# EAGLE board rele V2 (EAGLE 4.16)

Size 160 x 100 mm. Coordinates in mm from the lower left corner, seen from the top.
Outline: 0,0 160,0 160,100 0,100 0,0
Copper layers (1*16): Top 0.035mm / dielectric 1.5mm / Bottom 0.035mm
Design rules "default": minimum track width 10mil, minimum drill 24mil, track to track 8mil, track to pad 8mil, pad to pad 8mil, via to via 8mil, smd to smd 8mil, copper to edge 40mil, drill to drill 8mil, minimum pad ring 10mil, minimum via ring 8mil, stop-mask expansion 4mil, vias tented up to drill 0mil, thermal gap 10mil

## Footprints (pad centres in the part's own frame; a part is rotated, then mirrored left to right if it is on the bottom)
C025-040X050 = drill 0.813 octagon: 1 -1.27,0; 2 1.27,0
E2,5-6 = drill 0.813 pad 1.6 round: + -1.27,0 | drill 0.813 pad 1.6 octagon: - 1.27,0
DO41-10 = drill 1.118 round: A 5.08,0; C -5.08,0
DIL24-6 = drill 0.813 long: 1 -13.97,-7.62; 2 -11.43,-7.62; 3 -8.89,-7.62; 4 -6.35,-7.62; 5 -3.81,-7.62; 6 -1.27,-7.62; 7 1.27,-7.62; 8 3.81,-7.62; 9 6.35,-7.62; 10 8.89,-7.62; 11 11.43,-7.62; 12 13.97,-7.62; 13 13.97,7.62; 14 11.43,7.62; 15 8.89,7.62; 16 6.35,7.62; 17 3.81,7.62; 18 1.27,7.62; 19 -1.27,7.62; 20 -3.81,7.62; 21 -6.35,7.62; 22 -8.89,7.62; 23 -11.43,7.62; 24 -13.97,7.62
DIL20 = drill 0.813 long: 1 -11.43,-3.81; 2 -8.89,-3.81; 3 -6.35,-3.81; 4 -3.81,-3.81; 5 -1.27,-3.81; 6 1.27,-3.81; 7 3.81,-3.81; 8 6.35,-3.81; 9 8.89,-3.81; 10 11.43,-3.81; 11 11.43,3.81; 12 8.89,3.81; 13 6.35,3.81; 14 3.81,3.81; 15 1.27,3.81; 16 -1.27,3.81; 17 -3.81,3.81; 18 -6.35,3.81; 19 -8.89,3.81; 20 -11.43,3.81
DIL16 = drill 0.813 long: 1 -8.89,-3.81; 2 -6.35,-3.81; 3 -3.81,-3.81; 4 -1.27,-3.81; 5 1.27,-3.81; 6 3.81,-3.81; 7 6.35,-3.81; 8 8.89,-3.81; 9 8.89,3.81; 10 6.35,3.81; 11 3.81,3.81; 12 1.27,3.81; 13 -1.27,3.81; 14 -3.81,3.81; 15 -6.35,3.81; 16 -8.89,3.81
DIL08 = drill 0.813 long: 1 -3.81,-3.81; 2 -1.27,-3.81; 3 1.27,-3.81; 4 3.81,-3.81; 5 3.81,3.81; 6 1.27,3.81; 7 -1.27,3.81; 8 -3.81,3.81
TO220H = drill 1.118 long: 1 -2.54,-10.16; 2 0,-10.16; 3 2.54,-10.16 | hole 3.302: 0,4.826
337L = drill 0.813 octagon: ADJ -1.27,0; IN 1.27,0; OUT 0,1.905
E3206S = drill 1.397 long: 1 -3.175,3.81; 2 -3.175,-3.81; O 13.335,-3.81; P 17.145,3.81; S 20.955,-3.81
0207/10 = drill 0.813 octagon: 1 -5.08,0; 2 5.08,0
B25P = drill 0.813 octagon: A -2.54,0; E 2.54,0; S 0,2.54
RN-9 = drill 0.813 long: 1 -10.16,0; 2 -7.62,0; 3 -5.08,0; 4 -2.54,0; 5 0,0; 6 2.54,0; 7 5.08,0; 8 7.62,0; 9 10.16,0
B3F-10XX = drill 1.016 long: 1 -3.251,2.261; 2 3.251,2.261; 3 -3.251,-2.261; 4 3.251,-2.261
MA20-2 = drill 1.016 octagon: 1 -24.13,-1.27; 2 -24.13,1.27; 3 -21.59,-1.27; 4 -21.59,1.27; 5 -19.05,-1.27; 6 -19.05,1.27; 7 -16.51,-1.27; 8 -16.51,1.27; 9 -13.97,-1.27; 10 -13.97,1.27; 11 -11.43,-1.27; 12 -11.43,1.27; 13 -8.89,-1.27; 14 -8.89,1.27; 15 -6.35,-1.27; 16 -6.35,1.27; 17 -3.81,-1.27; 18 -3.81,1.27; 19 -1.27,-1.27; 20 -1.27,1.27; 21 1.27,-1.27; 22 1.27,1.27; 23 3.81,-1.27; 24 3.81,1.27; 25 6.35,-1.27; 26 6.35,1.27; 27 8.89,-1.27; 28 8.89,1.27; 29 11.43,-1.27; 30 11.43,1.27; 31 13.97,-1.27; 32 13.97,1.27; 33 16.51,-1.27; 34 16.51,1.27; 35 19.05,-1.27; 36 19.05,1.27; 37 21.59,-1.27; 38 21.59,1.27; 39 24.13,-1.27; 40 24.13,1.27
22-23-2021 = drill 0.813 long: 1 -1.27,0; 2 1.27,0
22-23-2031 = drill 0.813 long: 1 -2.54,0; 2 0,0; 3 2.54,0
22-23-2041 = drill 0.813 long: 1 -3.81,0; 2 -1.27,0; 3 1.27,0; 4 3.81,0

## Placement (x,y rotation side)
C1  [C025-040X050]  -156.85,86.83 0 top  (outside the outline)
C2  [C025-040X050]  -167.01,86.83 0 top  (outside the outline)
C3  [C025-040X050]  -177.17,86.83 0 top  (outside the outline)
C5  [C025-040X050]  -187.33,86.83 0 top  (outside the outline)
C6  [C025-040X050]  -197.49,86.83 0 top  (outside the outline)
C7  [C025-040X050]  -17.15,99.53 0 top  (outside the outline)
C9  [C025-040X050]  -27.31,99.53 0 top  (outside the outline)
C11  [E2,5-6]  -111.13,114.77 0 top  (outside the outline)
C12  [E2,5-6]  -126.37,114.77 0 top  (outside the outline)
C14  [E2,5-6]  -141.61,114.77 0 top  (outside the outline)
C15  [E2,5-6]  -156.85,114.77 0 top  (outside the outline)
C17  [E2,5-6]  -172.09,114.77 0 top  (outside the outline)
D1  1N4004  [DO41-10]  -41.28,99.53 0 top  (outside the outline)
D2  1N4004  [DO41-10]  -59.06,99.53 0 top  (outside the outline)
D3  1N4004  [DO41-10]  -76.84,99.53 0 top  (outside the outline)
D4  1N4004  [DO41-10]  -94.62,99.53 0 top  (outside the outline)
D5  1N4004  [DO41-10]  -112.4,99.53 0 top  (outside the outline)
D6  1N4004  [DO41-10]  -130.18,99.53 0 top  (outside the outline)
D7  1N4004  [DO41-10]  -147.96,99.53 0 top  (outside the outline)
D8  1N4004  [DO41-10]  -165.74,99.53 0 top  (outside the outline)
IC1  PCA9555N  [DIL24-6]  -47.63,11.9 0 top  (outside the outline)
IC2  74AC540N  [DIL20]  -83.19,10.63 0 top  (outside the outline)
IC3  PCF8574P  [DIL16]  -125.1,48.73 0 top  (outside the outline)
IC4  PCF8591P  [DIL16]  -150.5,48.73 0 top  (outside the outline)
IC5  LF351N  [DIL08]  -111.13,10.63 0 top  (outside the outline)
IC6  LF351N  [DIL08]  -131.45,10.63 0 top  (outside the outline)
IC7  LF351N  [DIL08]  -151.77,10.63 0 top  (outside the outline)
IC8  LF351N  [DIL08]  -172.09,10.63 0 top  (outside the outline)
IC9  7805T  [TO220H]  -20.96,16.98 0 top  (outside the outline)
IC10  [337L]  -146.69,86.83 0 top  (outside the outline)
K1  E3206S  [E3206S]  -38.74,33.49 0 top  (outside the outline)
K2  E3206S  [E3206S]  -71.76,33.49 0 top  (outside the outline)
K3  E3206S  [E3206S]  -104.78,33.49 0 top  (outside the outline)
K4  E3206S  [E3206S]  -137.8,33.49 0 top  (outside the outline)
K5  E3206S  [E3206S]  -170.82,33.49 0 top  (outside the outline)
K6  E3206S  [E3206S]  -38.74,50 0 top  (outside the outline)
K7  E3206S  [E3206S]  -71.76,50 0 top  (outside the outline)
K8  E3206S  [E3206S]  -104.78,50 0 top  (outside the outline)
R1  [0207/10]  -48.9,107.15 0 top  (outside the outline)
R2  [0207/10]  -66.68,107.15 0 top  (outside the outline)
R3  [0207/10]  -84.46,107.15 0 top  (outside the outline)
R4  [0207/10]  -102.24,107.15 0 top  (outside the outline)
R5  [0207/10]  -120.02,107.15 0 top  (outside the outline)
R6  [0207/10]  -137.8,107.15 0 top  (outside the outline)
R7  [B25P]  -161.93,76.67 0 top  (outside the outline)
R8  [B25P]  -174.63,76.67 0 top  (outside the outline)
R9  [B25P]  -187.33,76.67 0 top  (outside the outline)
R10  [B25P]  -18.42,89.37 0 top  (outside the outline)
R11  [0207/10]  -155.58,107.15 0 top  (outside the outline)
R12  [0207/10]  -173.36,107.15 0 top  (outside the outline)
R13  [0207/10]  -191.14,107.15 0 top  (outside the outline)
R14  [0207/10]  -20.96,114.77 0 top  (outside the outline)
R15  [0207/10]  -38.74,114.77 0 top  (outside the outline)
R16  [0207/10]  -56.52,114.77 0 top  (outside the outline)
R17  [0207/10]  -74.3,114.77 0 top  (outside the outline)
R18  [0207/10]  -92.08,114.77 0 top  (outside the outline)
RN1  [RN-9]  -188.6,99.53 0 top  (outside the outline)
RN2  [RN-9]  -26.04,107.15 0 top  (outside the outline)
S1  [B3F-10XX]  -50.17,76.67 0 top  (outside the outline)
S2  [B3F-10XX]  -64.14,76.67 0 top  (outside the outline)
S3  [B3F-10XX]  -78.11,76.67 0 top  (outside the outline)
S4  [B3F-10XX]  -92.08,76.67 0 top  (outside the outline)
S5  [B3F-10XX]  -106.05,76.67 0 top  (outside the outline)
S6  [B3F-10XX]  -120.02,76.67 0 top  (outside the outline)
S7  [B3F-10XX]  -133.99,76.67 0 top  (outside the outline)
S8  [B3F-10XX]  -147.96,76.67 0 top  (outside the outline)
SV2  [MA20-2]  -52.71,88.1 0 top  (outside the outline)
SV3  [MA20-2]  -108.59,88.1 0 top  (outside the outline)
X1  22-23-2021  [22-23-2021]  -144.15,63.97 0 top  (outside the outline)
X2  22-23-2031  [22-23-2031]  -192.41,47.46 0 top  (outside the outline)
X3  22-23-2031  [22-23-2031]  -20.96,63.97 0 top  (outside the outline)
X4  22-23-2031  [22-23-2031]  -38.74,63.97 0 top  (outside the outline)
X5  22-23-2031  [22-23-2031]  -56.52,63.97 0 top  (outside the outline)
X6  22-23-2031  [22-23-2031]  -74.3,63.97 0 top  (outside the outline)
X7  22-23-2031  [22-23-2031]  -92.08,63.97 0 top  (outside the outline)
X8  22-23-2031  [22-23-2031]  -109.86,63.97 0 top  (outside the outline)
X9  22-23-2031  [22-23-2031]  -127.64,63.97 0 top  (outside the outline)
X10  22-23-2021  [22-23-2021]  -159.39,63.97 0 top  (outside the outline)
X11  22-23-2021  [22-23-2021]  -174.63,63.97 0 top  (outside the outline)
X12  22-23-2021  [22-23-2021]  -189.87,63.97 0 top  (outside the outline)
X13  22-23-2021  [22-23-2021]  -19.69,76.67 0 top  (outside the outline)
X14  22-23-2021  [22-23-2021]  -34.93,76.67 0 top  (outside the outline)
X15  22-23-2041  [22-23-2041]  -173.36,47.46 0 top  (outside the outline)

## Library data of the parts
C1-C3 C5-C7 C9 C11 C12 C14 C15 C17 R1-R6 R11-R18 = rcl
D1-D8 = diode
IC1 IC3 IC4 = micro-philips
IC2 = 74xx-eu
IC5-IC9 = linear
IC10 = v-reg
K1-K8 = relay
R7-R10 = pot
RN1 RN2 = resistor-net
S1-S8 = switch-omron
SV2 SV3 = con-lstb
X1-X15 = con-molex

## Nets
GND: C1.2 C2.1 C3.2 C5.2 C6.2 C7.2 C9.2 C11.- C12.- C14.- C15.+ IC1.12 IC1.21 IC2.1 IC2.10 IC2.19 IC3.8 IC4.7 IC4.8 IC4.12 IC4.13 IC5.3 IC6.3 IC7.3 IC8.3 IC9.2 IC10.ADJ S1.1 S2.1 S4.1 S5.1 S7.1 S8.1 SV2.1 SV2.2 SV3.39 SV3.40 X1.1 X11.1 X12.1 X13.1 X14.1 X15.2 X15.3
N$1: IC2.9 IC3.12
N$2: IC2.8 IC3.11
N$3: IC2.7 IC3.10
N$4: IC2.6 IC3.9
N$5: IC2.5 IC3.7
N$6: IC2.4 IC3.6
N$7: IC2.3 IC3.5
N$8: IC2.2 IC3.4
N$9: IC4.1 IC5.6 R5.2
N$10: IC4.2 IC6.6 R6.2
N$11: IC1.22 IC3.14 IC4.10 R1.2 SV3.31
N$12: IC1.23 IC3.15 IC4.9 R2.2 SV3.32
N$13: IC4.3 IC7.6 R13.2
N$14: D5.A IC2.11 K7.2
N$15: D6.A IC2.12 K6.1
N$16: D4.A IC2.13 K5.2
N$17: D7.A IC2.14 K4.1
N$18: D3.A IC2.15 K3.2
N$19: D8.A IC2.18 K8.1
N$20: D2.A IC2.17 K1.2
N$21: D1.A IC2.16 K2.1
N$22: IC4.4 IC8.6 R16.2
N$23: IC1.4 RN2.2 S1.3
N$24: K1.P K2.P K3.P K4.P K5.P K6.P K7.P K8.P X10.2
N$25: K1.O X3.3
N$26: K1.S X3.2
N$27: K8.O X2.3
N$28: K8.S X2.2
N$29: X2.1 X3.1 X4.1 X5.1 X6.1 X7.1 X8.1 X9.1 X10.1
N$30: IC1.5 RN2.3 S2.3
N$31: R8.S R12.1
N$32: K7.O X9.3
N$33: K7.S X9.2
N$34: K6.O X8.3
N$35: K6.S X8.2
N$36: K5.O X7.3
N$37: K5.S X7.2
N$38: K4.O X6.3
N$39: K4.S X6.2
N$40: K3.O X5.3
N$41: K3.S X5.2
N$42: K2.O X4.3
N$43: K2.S X4.2
N$44: IC1.6 RN2.4 S3.3
N$45: IC1.7 RN2.5 S4.3
N$46: IC1.8 RN2.6 S5.3
N$47: IC1.9 RN2.7 S6.3
N$48: IC1.10 RN2.8 S7.3
N$49: IC1.11 RN2.9 S8.3
N$50: IC1.13 RN1.9
N$51: IC1.14 RN1.8
N$52: IC1.15 RN1.7
N$53: IC1.16 RN1.6
N$54: IC1.17 RN1.5
N$55: IC1.18 RN1.4
N$56: IC1.19 RN1.3
N$57: IC1.20 RN1.2
N$58: IC5.2 R3.2 R4.2 R5.1
N$60: R3.1
N$61: IC7.2 R13.1 R14.2 R15.2
N$62: R4.1 R7.S
N$63: IC6.2 R6.1 R11.2 R12.2
N$64: R17.1 X13.2
N$65: IC8.2 R16.1 R17.2 R18.2
N$66: R9.S R15.1
N$67: R10.S R18.1
N$68: R14.1 X12.2
N$69: R11.1 X11.2
N$72: IC4.14 IC4.16
N$74: C2.2 C6.1 C7.1 C9.1 C15.- IC5.4 IC6.4 IC7.4 IC8.4 IC10.OUT R7.A R8.A R9.A R10.A
N$75: C1.1 C12.+ D1.C D2.C D3.C D4.C D5.C D6.C D7.C D8.C IC9.3 K1.1 K2.2 K3.1 K4.2 K5.1 K6.2 K7.1 K8.2 X15.1
N$76: C3.1 C11.+ IC9.1 IC10.IN X14.2
VCC: C5.1 C14.+ IC1.2 IC1.3 IC1.24 IC2.20 IC3.1 IC3.2 IC3.3 IC3.16 IC4.5 IC4.6 IC5.7 IC6.7 IC7.7 IC8.7 R1.1 R2.1 R7.E R8.E R9.E R10.E RN1.1 RN2.1 SV2.39 SV2.40 SV3.1 SV3.2

## Tracks (layer width: path | path; a pad name or v marks a point on that pad's centre or on a via)
GND  (43 unrouted)
N$1  (1 unrouted)
N$2  (1 unrouted)
N$3  (1 unrouted)
N$4  (1 unrouted)
N$5  (1 unrouted)
N$6  (1 unrouted)
N$7  (1 unrouted)
N$8  (1 unrouted)
N$9  (2 unrouted)
N$10  (2 unrouted)
N$11  (4 unrouted)
N$12  (4 unrouted)
N$13  (2 unrouted)
N$14  (2 unrouted)
N$15  (2 unrouted)
N$16  (2 unrouted)
N$17  (2 unrouted)
N$18  (2 unrouted)
N$19  (2 unrouted)
N$20  (2 unrouted)
N$21  (2 unrouted)
N$22  (2 unrouted)
N$23  (2 unrouted)
N$24  (8 unrouted)
N$25  (1 unrouted)
N$26  (1 unrouted)
N$27  (1 unrouted)
N$28  (1 unrouted)
N$29  (8 unrouted)
N$30  (2 unrouted)
N$31  (1 unrouted)
N$32  (1 unrouted)
N$33  (1 unrouted)
N$34  (1 unrouted)
N$35  (1 unrouted)
N$36  (1 unrouted)
N$37  (1 unrouted)
N$38  (1 unrouted)
N$39  (1 unrouted)
N$40  (1 unrouted)
N$41  (1 unrouted)
N$42  (1 unrouted)
N$43  (1 unrouted)
N$44  (2 unrouted)
N$45  (2 unrouted)
N$46  (2 unrouted)
N$47  (2 unrouted)
N$48  (2 unrouted)
N$49  (2 unrouted)
N$50  (1 unrouted)
N$51  (1 unrouted)
N$52  (1 unrouted)
N$53  (1 unrouted)
N$54  (1 unrouted)
N$55  (1 unrouted)
N$56  (1 unrouted)
N$57  (1 unrouted)
N$58  (3 unrouted)
N$61  (3 unrouted)
N$62  (1 unrouted)
N$63  (3 unrouted)
N$64  (1 unrouted)
N$65  (3 unrouted)
N$66  (1 unrouted)
N$67  (1 unrouted)
N$68  (1 unrouted)
N$69  (1 unrouted)
N$72  (1 unrouted)
N$74  (13 unrouted)
N$75  (19 unrouted)
N$76  (4 unrouted)
VCC  (27 unrouted)